# Altium PCB TLC5940ControlBoard.PcbDoc
Units mil, origin at the board's own origin, x right, y up, seen from the top; angles counter-clockwise.
Board outline 4320 x 3750 mil, 2 copper layers (Top Layer, Bottom Layer); 56 components, 103 nets, 256 pads, 18 vias.
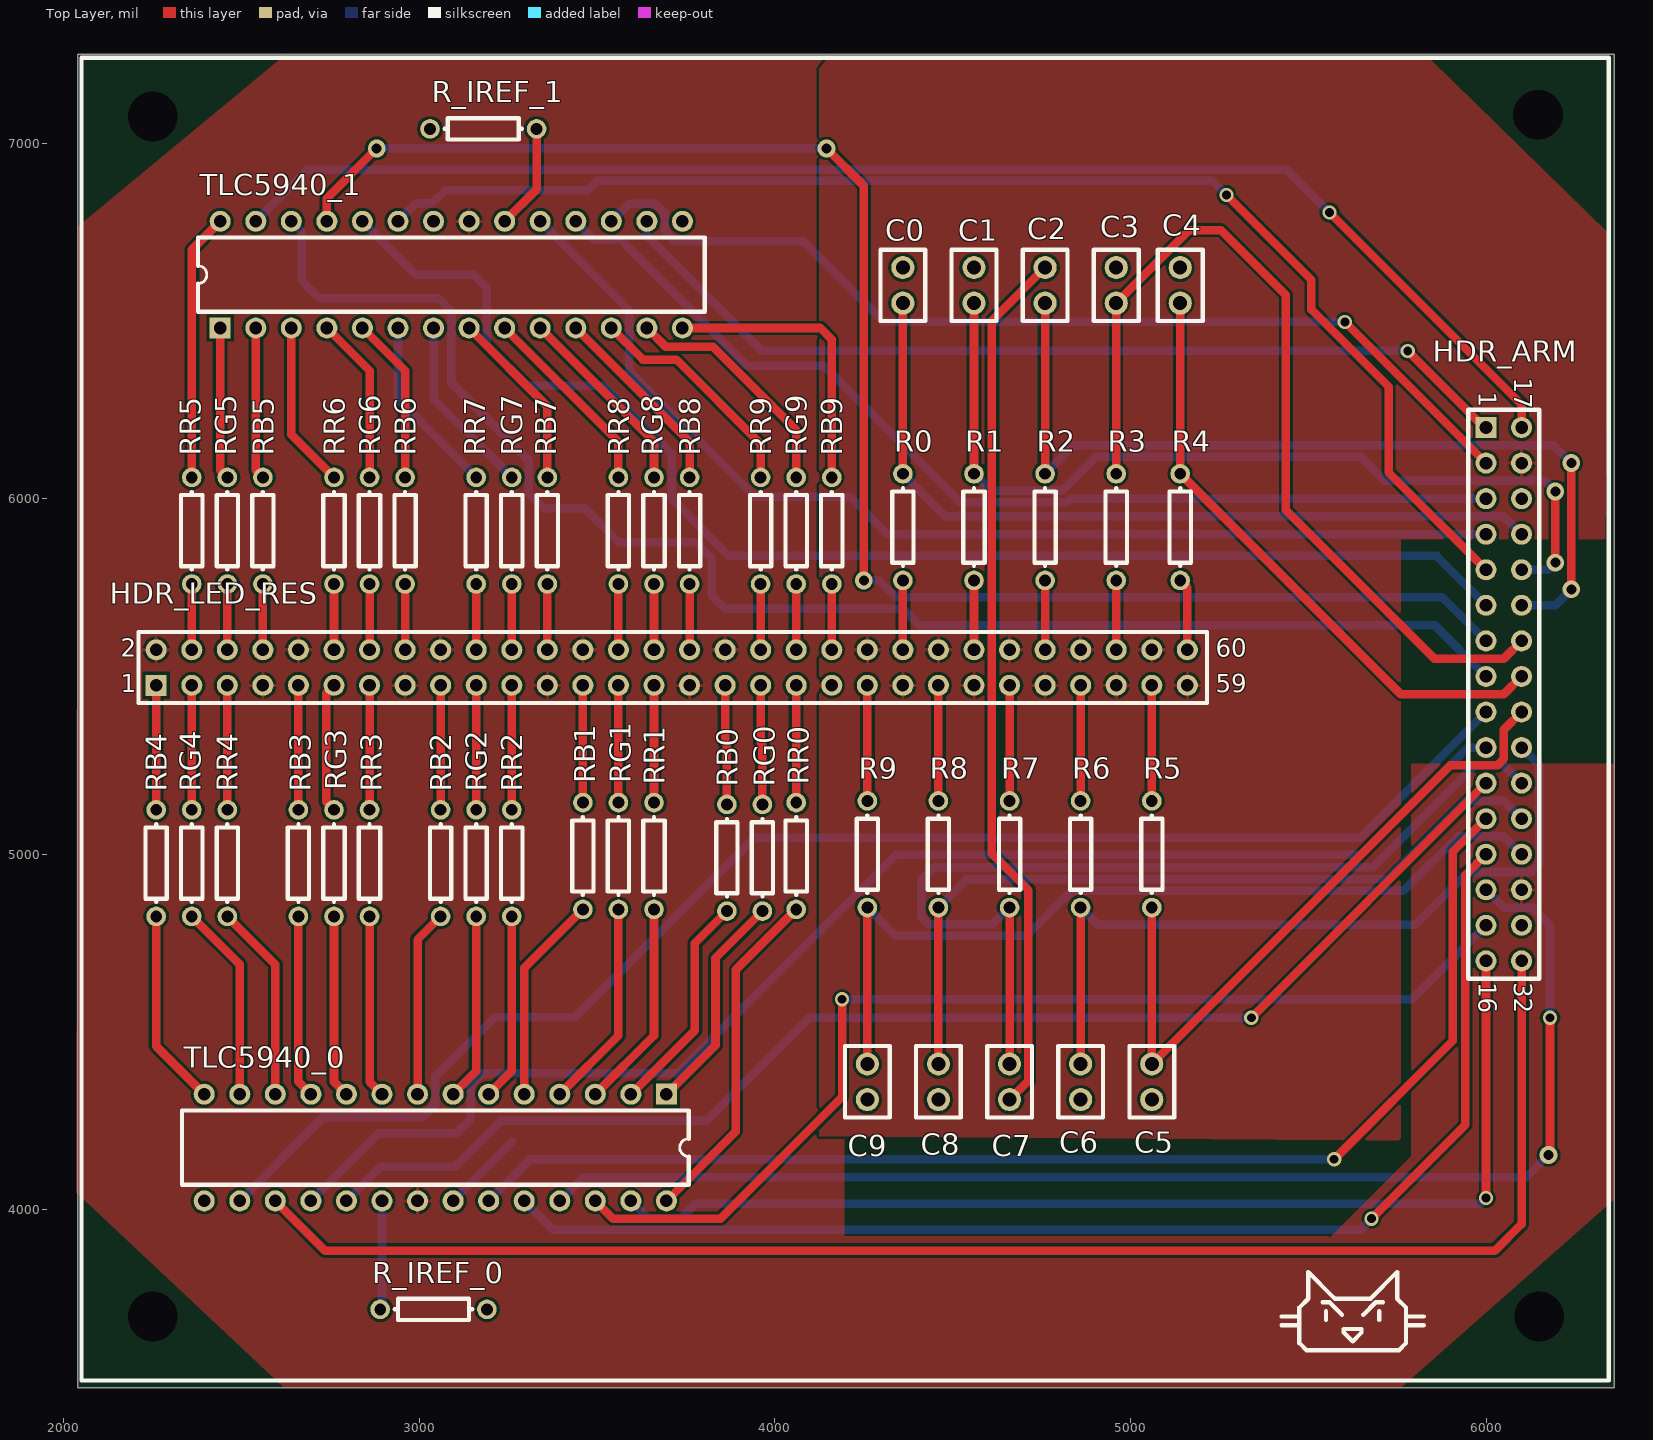
[diagram p0: Top Layer view]
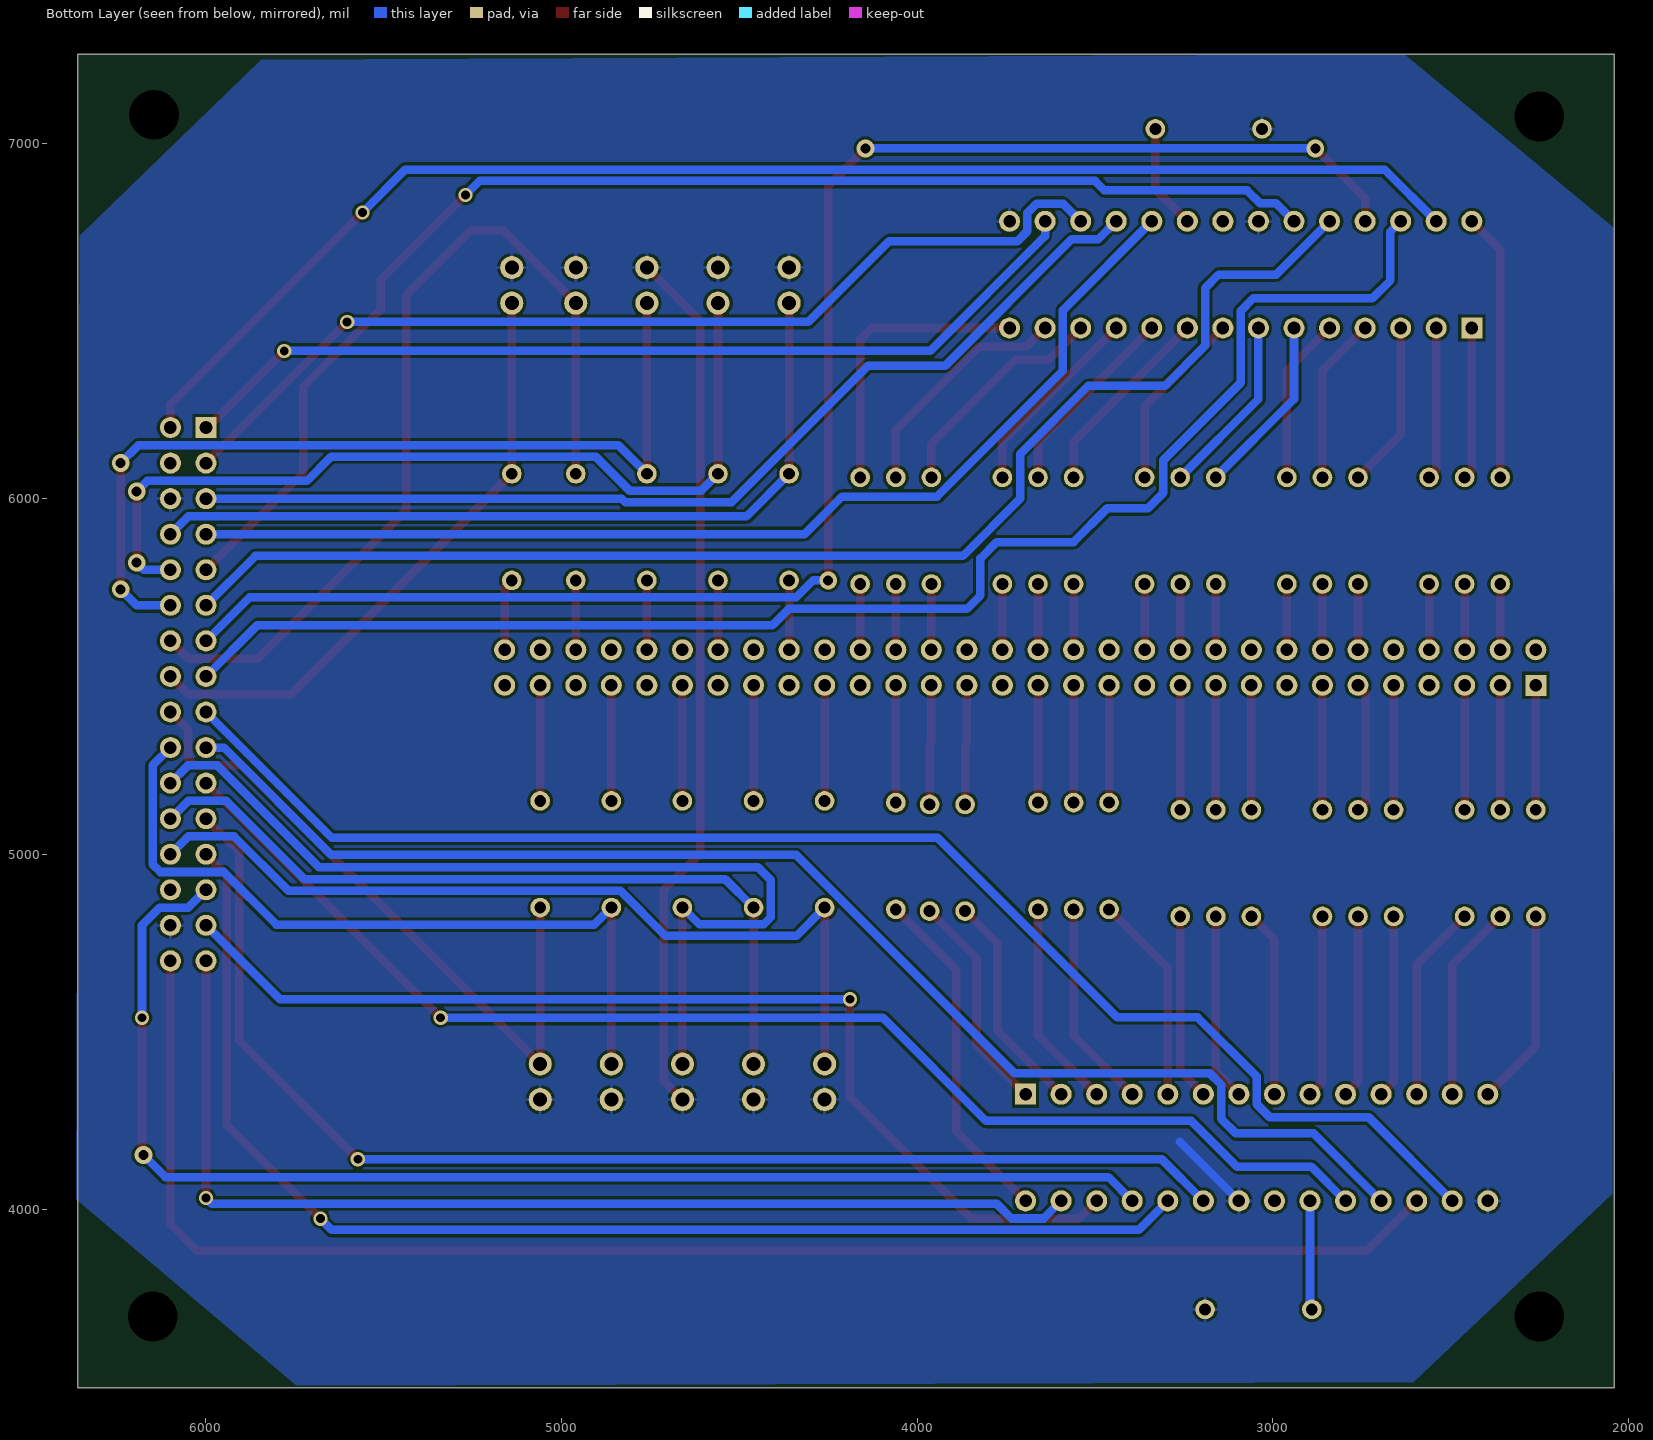
[diagram p1: Bottom Layer view, seen from below]

## Layer stack, top to bottom
Top Layer: signal copper 1.4
Dielectric: dielectric 12.6, FR-4, Dk 4.8
Bottom Layer: signal copper 1.4

## Board outline
2040,7250 6360,7250 6360,3500 2040,3500 2040,7250

## Design rules (kind name [scope] priority, off if disabled: settings)
Clearance [All] p1: gap=8
PolygonConnect [All] p1: connectstyle=Relief reliefconductorwidth=10 reliefentries=4 polygonreliefangle="90 Angle"
RoutingVias [All] p1: holewidth=25 width=40 viastyle="Through Hole" minholewidth=28 minwidth=50 maxholewidth=28 maxwidth=50
SilkscreenOverComponentPads [All] p1: minsilkscreentomaskgap=10
SolderMaskExpansion [All] p1: expansion=4
Width [All] p1: maxlimit=30 minlimit=6 preferedwidth=24 impedancedriven=TRUE minimp=50.000000 maximp=50.000000 favimp=50.000000
27 further rules are at their usual default settings.

## Components (designator, comment, footprint, x,y, rotation, side; value= is the part's Value field where it differs from the comment)
C0 "Cap" CAPR2.54-5.1x3.2 4360,6600 r270 top
C1 "Cap" CAPR2.54-5.1x3.2 4560,6600 r270 top
C2 "Cap" CAPR2.54-5.1x3.2 4760,6600 r270 top
C3 "Cap" CAPR2.54-5.1x3.2 4960,6600 r270 top
C4 "Cap" CAPR2.54-5.1x3.2 5140,6600 r270 top
C5 "Cap" CAPR2.54-5.1x3.2 5060,4360 r90 top
C6 "Cap" CAPR2.54-5.1x3.2 4860,4360 r90 top
C7 "Cap" CAPR2.54-5.1x3.2 4660,4360 r90 top
C8 "Cap" CAPR2.54-5.1x3.2 4460,4360 r90 top
C9 "Cap" CAPR2.54-5.1x3.2 4260,4360 r90 top
HDR_ARM "Header 16X2A" HDR2X16_CEN 6000,6200 r270 top
HDR_LED_RES "Header 30X2" HDR2X30 2260,5475 r0 top
R0 "Comment" AXIAL-0.3 4360,5920 r270 top
R1 "Comment" AXIAL-0.3 4560,5920 r270 top
R2 "Comment" AXIAL-0.3 4760,5920 r270 top
R3 "Comment" AXIAL-0.3 4960,5920 r270 top
R4 "Comment" AXIAL-0.3 5140,5920 r270 top
R5 "Comment" AXIAL-0.3 5060,5000 r90 top
R6 "Comment" AXIAL-0.3 4860,5000 r90 top
R7 "Comment" AXIAL-0.3 4660,5000 r90 top
R8 "Comment" AXIAL-0.3 4460,5000 r90 top
R9 "Comment" AXIAL-0.3 4260,5000 r90 top
R_IREF_0 "Res1" AXIAL-0.3 3040,3720 r180 top
R_IREF_1 "Res1" AXIAL-0.3 3180,7040 r0 top
RB0 "Res1" AXIAL-0.3 3865,4990 r90 top
RB1 "Res1" AXIAL-0.3 3460,4995 r90 top
RB2 "Res1" AXIAL-0.3 3060,4975 r90 top
RB3 "Res1" AXIAL-0.3 2660,4975 r90 top
RB4 "Res1" AXIAL-0.3 2260,4975 r90 top
RB5 "Res1" AXIAL-0.3 2560,5910 r270 top
RB6 "Res1" AXIAL-0.3 2960,5910 r270 top
RB7 "Res1" AXIAL-0.3 3360,5910 r270 top
RB8 "Res1" AXIAL-0.3 3760,5910 r270 top
RB9 "Res1" AXIAL-0.3 4160,5910 r270 top
RG0 "Res1" AXIAL-0.3 3965,4990 r90 top
RG1 "Res1" AXIAL-0.3 3560,4995 r90 top
RG2 "Res1" AXIAL-0.3 3160,4975 r90 top
RG3 "Res1" AXIAL-0.3 2760,4975 r90 top
RG4 "Res1" AXIAL-0.3 2360,4975 r90 top
RG5 "Res1" AXIAL-0.3 2460,5910 r270 top
RG6 "Res1" AXIAL-0.3 2860,5910 r270 top
RG7 "Res1" AXIAL-0.3 3260,5910 r270 top
RG8 "Res1" AXIAL-0.3 3660,5910 r270 top
RG9 "Res1" AXIAL-0.3 4060,5910 r270 top
RR0 "Res1" AXIAL-0.3 4060,4995 r90 top
RR1 "Res1" AXIAL-0.3 3660,4995 r90 top
RR2 "Res1" AXIAL-0.3 3260,4975 r90 top
RR3 "Res1" AXIAL-0.3 2860,4975 r90 top
RR4 "Res1" AXIAL-0.3 2460,4975 r90 top
RR5 "Res1" AXIAL-0.3 2360,5910 r270 top
RR6 "Res1" AXIAL-0.3 2760,5910 r270 top
RR7 "Res1" AXIAL-0.3 3160,5910 r270 top
RR8 "Res1" AXIAL-0.3 3560,5910 r270 top
RR9 "Res1" AXIAL-0.3 3960,5910 r270 top
TLC5940_0 "SLVS515_NT_28" NT028 3045,4175 r180 top
TLC5940_1 "SLVS515_NT_28" NT028 3090,6630 r0 top

## Footprints (in the part's own frame and the unit in brackets; to place one, negate y for a bottom-side part, rotate by r counter-clockwise, add the part's x,y. Pads: shape width x height; smd on the part's side, far side on the other; paste and mask are expansions set on the pad)
AXIAL-0.3 [mm] "Axial Device, Thru-Hole; 2 Leads; 0.3 in Pin Spacing"
  round 1.4 hole 0.85: 1(-3.81,0) 2(3.81,0)
  silkscreen extent -2.77,-0.76 2.77,0.76
CAPR2.54-5.1x3.2 [mm] "Capacitor, Ceramic, Thru-Hole, Dipped Radial; Body 5.1 x 3.2 mm (WxT) Pin Spacing 2.54 mm (typ)"
  round 1.65 hole 1: 1(-1.27,0) 2(1.27,0)
  silkscreen extent -2.55,-1.6 2.55,1.6
HDR2X16_CEN [mm] "Connector; Header; 16x2 Position"
  rect 1.5x1.5 hole 0.9: 1(0,0)
  round 1.5 hole 0.9: 2(2.54,0) 3(5.08,0) 4(7.62,0) 5(10.16,0) 6(12.7,0) 7(15.24,0) 8(17.78,0) 9(20.32,0) 10(22.86,0) 11(25.4,0) 12(27.94,0) 13(30.48,0) 14(33.02,0) 15(35.56,0) 16(38.1,0) 17(0,2.54) 18(2.54,2.54) 19(5.08,2.54) 20(7.62,2.54) 21(10.16,2.54) 22(12.7,2.54) 23(15.24,2.54) 24(17.78,2.54) 25(20.32,2.54) 26(22.86,2.54) 27(25.4,2.54) 28(27.94,2.54) 29(30.48,2.54) 30(33.02,2.54) 31(35.56,2.54) 32(38.1,2.54)
  silkscreen extent -1.27,-1.27 39.37,3.81
HDR2X30 [mm] "Connector; Header; 30x2 Position"
  rect 1.5x1.5 hole 0.9: 1(0,0)
  round 1.5 hole 0.9: 2(0,2.54) 3(2.54,0) 4(2.54,2.54) 5(5.08,0) 6(5.08,2.54) 7(7.62,0) 8(7.62,2.54) 9(10.16,0) 10(10.16,2.54) 11(12.7,0) 12(12.7,2.54) 13(15.24,0) 14(15.24,2.54) 15(17.78,0) 16(17.78,2.54) 17(20.32,0) 18(20.32,2.54) 19(22.86,0) 20(22.86,2.54) 21(25.4,0) 22(25.4,2.54) 23(27.94,0) 24(27.94,2.54) 25(30.48,0) 26(30.48,2.54) 27(33.02,0) 28(33.02,2.54) 29(35.56,0) 30(35.56,2.54) 31(38.1,0) 32(38.1,2.54) 33(40.64,0) 34(40.64,2.54) 35(43.18,0) 36(43.18,2.54) 37(45.72,0) 38(45.72,2.54) 39(48.26,0) 40(48.26,2.54) 41(50.8,0) 42(50.8,2.54) 43(53.34,0) 44(53.34,2.54) 45(55.88,0) 46(55.88,2.54) 47(58.42,0) 48(58.42,2.54) 49(60.96,0) 50(60.96,2.54) 51(63.5,0) 52(63.5,2.54) 53(66.04,0) 54(66.04,2.54) 55(68.58,0) 56(68.58,2.54) 57(71.12,0) 58(71.12,2.54) 59(73.66,0) 60(73.66,2.54)
  silkscreen extent -1.27,-1.27 75.06,3.81
NT028 [mm] "DIP; 28 Leads; Row Spacing 7.62 mm; Pitch 2.54 mm"
  rect 1.5x1.5 hole 0.9: 1(-16.51,-3.81)
  round 1.5 hole 0.9: 2(-13.97,-3.81) 3(-11.43,-3.81) 4(-8.89,-3.81) 5(-6.35,-3.81) 6(-3.81,-3.81) 7(-1.27,-3.81) 8(1.27,-3.81) 9(3.81,-3.81) 10(6.35,-3.81) 11(8.89,-3.81) 12(11.43,-3.81) 13(13.97,-3.81) 14(16.51,-3.81) 15(16.51,3.81) 16(13.97,3.81) 17(11.43,3.81) 18(8.89,3.81) 19(6.35,3.81) 20(3.81,3.81) 21(1.27,3.81) 22(-1.27,3.81) 23(-3.81,3.81) 24(-6.35,3.81) 25(-8.89,3.81) 26(-11.43,3.81) 27(-13.97,3.81) 28(-16.51,3.81)
  silkscreen extent -18.1,-2.65 18.1,2.65

## Part data
C0 C1 C2 C3 C4 C5 C6 C7 C8 C9: "Capacitor"
HDR_ARM: "Header, 16-Pin, Dual row"
HDR_LED_RES: "Header, 30-Pin, Dual row"
R0 R1 R2 R3 R4 R5 R6 R7 R8 R9: library part Res1, "Resistor"
R_IREF_0 R_IREF_1 RB0 RB1 RB2 RB3 RB4 RB5 RB6 RB7 RB8 RB9 RG0 RG1 RG2 RG3 RG4 RG5 RG6 RG7 RG8 RG9 RR0 RR1 RR2 RR3 RR4 RR5 RR6 RR7 RR8 RR9: "Resistor"

## Free pads (board coordinates)
  round 60 hole 140: 2(2250,7075) 3(2250,3700) 4(6150,3700) 5(6145.91,7079.98)

## Via types
v1: diameter 40, hole 25, Top Layer to Bottom Layer, 10 vias
v2: diameter 50, hole 28, Top Layer to Bottom Layer, 8 vias

## Nets (pads, with @x,y where several pads share a name; then routed paths per layer and width w, separated by ;. In a path a pad name is that pad's centre, name@x,y a point inside that pad or via, vN(x,y) a via of type N, cw(c..) or ccw(c..) an arc to the next point about the centre after c; other vN are vias at no path point)
BLANK_0: HDR_ARM.12 TLC5940_0.23 | length 3561.3
  Top Layer w24: v1(5573,4142) 5906,4475 5906,5006 HDR_ARM.12
  Bottom Layer w24: TLC5940_0.23 3312,4142 v1(5573,4142)
BLANK_1: HDR_ARM.5 TLC5940_1.23 | length 3749.8
  Top Layer w24: v1(5270,6854) 5509,6615 5509,6532 5726,6315 5726,6074 HDR_ARM.5
  Bottom Layer w24: TLC5940_1.23 2991,6831 3036,6831 3072,6867 3473,6867 3499.53,6893.53 5230.47,6893.53 v1(5270,6854)
CAPREADING0: C0.2 HDR_ARM.20 R0.1 | length 2290.4
  Top Layer w24: R0.1 C0.2
  Bottom Layer w24: R0.1 4480,5950 6050,5950 HDR_ARM.20
CAPREADING1: C1.2 HDR_ARM.21 R1.1 | length 2518.2
  Top Layer w24: R1.1 C1.2 ; v2(6195,5820) v2(6195,6020)
  Bottom Layer w24: R1.1 4607.56,6022.44 4808,6022.44 4903.56,6118 5648,6118 5716,6050 6165,6050 v2(6195,6020) ; HDR_ARM.21 6175,5800 v2(6195,5820)
CAPREADING2: C2.2 HDR_ARM.22 R2.1 | length 2527.5
  Top Layer w24: R2.1 C2.2 ; v2(6240,5745) v2(6240,6100)
  Bottom Layer w24: R2.1 4840,6150 6190,6150 v2(6240,6100) ; HDR_ARM.22 6195,5700 v2(6240,5745)
CAPREADING3: C3.2 HDR_ARM.23 R3.1 | length 2579.2
  Top Layer w24: R3.1 C3.2 5165,6755 5255,6755 5437,6573 5437,5968 5855,5550 6050,5550 HDR_ARM.23
CAPREADING4: C4.2 HDR_ARM.24 R4.1 | length 1717.5
  Top Layer w24: C4.2 R4.1 5760,5450 6050,5450 HDR_ARM.24
CAPREADING5: C5.2 HDR_ARM.25 R5.1 | length 1938.1
  Top Layer w24: R5.1 C5.2 5900,5250 6032,5250 6050,5268 6050,5350 HDR_ARM.25
CAPREADING6: C6.2 HDR_ARM.26 R6.1 | length 2169
  Top Layer w24: C6.2 R6.1
  Bottom Layer w24: R6.1 4908,4802 5802,4802 5950,4950 6128,4950 6150,4972 6150,5250 HDR_ARM.26
CAPREADING7: C7.2 HDR_ARM.27 R7.1 | length 2663.6
  Top Layer w24: C7.2 R7.1
  Bottom Layer w24: R7.1 4612.44,4802.44 4432,4802.44 4412,4822.44 4412,4928 4448,4964 5682.89,4964 5968.89,5250 6050,5250 HDR_ARM.27
CAPREADING8: C8.2 HDR_ARM.28 R8.1 | length 2225
  Top Layer w24: C8.2 R8.1
  Bottom Layer w24: R8.1 4539.56,4929.56 5722.82,4929.56 5943.26,5150 6050,5150 HDR_ARM.28
CAPREADING9: C9.2 HDR_ARM.29 R9.1 | length 2449.5
  Top Layer w24: C9.2 R9.1
  Bottom Layer w24: R9.1 4339.56,4770.44 4708,4770.44 4835.12,4897.56 5768.56,4897.56 5921,5050 6050,5050 HDR_ARM.29
DCPRG_0: HDR_ARM.11 TLC5940_0.19 | length 3691.7
  Top Layer w24: v1(5340,4540) HDR_ARM.11
  Bottom Layer w24: TLC5940_0.19 2891,4121 3100,4121 3229,4250 3806,4250 4096,4540 v1(5340,4540)
DCPRG_1: HDR_ARM.4 TLC5940_1.19 | length 3124.1
  Bottom Layer w24: TLC5940_1.19 3590,6530 3590,6360 3944,6006 4211,6006 4317,5900 HDR_ARM.4
GND: C0.1 C1.1 C2.1 C3.1 C4.1 C5.1 C6.1 C7.1 C8.1 C9.1 HDR_ARM.19 HDR_ARM.31 R_IREF_0.1 R_IREF_1.1 TLC5940_0.15 TLC5940_0.22 TLC5940_1.15 TLC5940_1.22 | length 2701.5
  Top Layer w24: C7.1 4713,4363 4713,4899 4610,5002 4610,6500 C2.1
  Bottom Layer w24: TLC5940_0.22 3261,4191
GSCLK_0: HDR_ARM.10 TLC5940_0.18 | length 3889.4
  Bottom Layer w24: TLC5940_0.18 2885,4215 3104,4215 3145,4256 3145,4352 3177,4384 3726,4384 4340,4998 5647.72,4998 5949.72,5300 HDR_ARM.10
GSCLK_1: HDR_ARM.3 TLC5940_1.18 | length 2891
  Bottom Layer w24: TLC5940_1.18 3490,6730 3565,6730 3921,6374 4138,6374 4521.56,5990.44 4821.44,5990.44 4831,6000 HDR_ARM.3
LED0_BLUE: HDR_LED_RES.33 RB0.2 | length 337.1
  Top Layer w24: HDR_LED_RES.33 3860,5313 3865,5308 RB0.2
LED0_GREEN: HDR_LED_RES.35 RG0.2 | length 337.1
  Top Layer w24: HDR_LED_RES.35 3960,5313 3965,5308 RG0.2
LED0_RED: HDR_LED_RES.37 RR0.2 | length 330
  Top Layer w24: RR0.2 HDR_LED_RES.37
LED1_BLUE: HDR_LED_RES.25 RB1.2 | length 330
  Top Layer w24: RB1.2 HDR_LED_RES.25
LED1_GREEN: HDR_LED_RES.27 RG1.2 | length 330
  Top Layer w24: RG1.2 HDR_LED_RES.27
LED1_RED: HDR_LED_RES.29 RR1.2 | length 330
  Top Layer w24: RR1.2 HDR_LED_RES.29
LED2_BLUE: HDR_LED_RES.17 RB2.2 | length 350
  Top Layer w24: RB2.2 HDR_LED_RES.17
LED2_GREEN: HDR_LED_RES.19 RG2.2 | length 350
  Top Layer w24: RG2.2 HDR_LED_RES.19
LED2_RED: HDR_LED_RES.21 RR2.2 | length 350
  Top Layer w24: RR2.2 HDR_LED_RES.21
LED3_BLUE: HDR_LED_RES.9 RB3.2 | length 350
  Top Layer w24: RB3.2 HDR_LED_RES.9
LED3_GREEN: HDR_LED_RES.11 RG3.2 | length 368.2
  Top Layer w24: RG3.2 2738,5147 2738,5453 HDR_LED_RES.11
LED3_RED: HDR_LED_RES.13 RR3.2 | length 350
  Top Layer w24: RR3.2 HDR_LED_RES.13
LED4_BLUE: HDR_LED_RES.1 RB4.2 | length 350
  Top Layer w24: RB4.2 HDR_LED_RES.1
LED4_GREEN: HDR_LED_RES.3 RG4.2 | length 350
  Top Layer w24: RG4.2 HDR_LED_RES.3
LED4_RED: HDR_LED_RES.5 RR4.2 | length 350
  Top Layer w24: RR4.2 HDR_LED_RES.5
LED5_BLUE: HDR_LED_RES.8 RB5.2 | length 185
  Top Layer w24: HDR_LED_RES.8 RB5.2
LED5_GREEN: HDR_LED_RES.6 RG5.2 | length 185
  Top Layer w24: HDR_LED_RES.6 RG5.2
LED5_RED: HDR_LED_RES.4 RR5.2 | length 185
  Top Layer w24: HDR_LED_RES.4 RR5.2
LED6_BLUE: HDR_LED_RES.16 RB6.2 | length 185
  Top Layer w24: HDR_LED_RES.16 RB6.2
LED6_GREEN: HDR_LED_RES.14 RG6.2 | length 185
  Top Layer w24: HDR_LED_RES.14 RG6.2
LED6_RED: HDR_LED_RES.12 RR6.2 | length 185
  Top Layer w24: HDR_LED_RES.12 RR6.2
LED7_BLUE: HDR_LED_RES.24 RB7.2 | length 185
  Top Layer w24: HDR_LED_RES.24 RB7.2
LED7_GREEN: HDR_LED_RES.22 RG7.2 | length 185
  Top Layer w24: HDR_LED_RES.22 RG7.2
LED7_RED: HDR_LED_RES.20 RR7.2 | length 185
  Top Layer w24: HDR_LED_RES.20 RR7.2
LED8_BLUE: HDR_LED_RES.32 RB8.2 | length 185
  Top Layer w24: HDR_LED_RES.32 RB8.2
LED8_GREEN: HDR_LED_RES.30 RG8.2 | length 185
  Top Layer w24: HDR_LED_RES.30 RG8.2
LED8_RED: HDR_LED_RES.28 RR8.2 | length 185
  Top Layer w24: HDR_LED_RES.28 RR8.2
LED9_BLUE: HDR_LED_RES.40 RB9.2 | length 185
  Top Layer w24: HDR_LED_RES.40 RB9.2
LED9_GREEN: HDR_LED_RES.38 RG9.2 | length 185
  Top Layer w24: HDR_LED_RES.38 RG9.2
LED9_RED: HDR_LED_RES.36 RR9.2 | length 185
  Top Layer w24: HDR_LED_RES.36 RR9.2
NetR_IREF_0_2: R_IREF_0.2 TLC5940_0.20 | length 300
  Bottom Layer w24: R_IREF_0.2@2895,3725 TLC5940_0.20
NetR_IREF_1_2: R_IREF_1.2 TLC5940_1.20 | length 297.3
  Top Layer w24: TLC5940_1.20 3330,6870 R_IREF_1.2
NetRB0_1: RB0.1 TLC5940_0.2 | length 626.8
  Top Layer w24: TLC5940_0.2 3775,4505 3775,4750 RB0.1
NetRB1_1: RB1.1 TLC5940_0.5 | length 588.3
  Top Layer w24: TLC5940_0.5 3295,4680 RB1.1
NetRB2_1: RB2.1 TLC5940_0.8 | length 526.9
  Top Layer w24: TLC5940_0.8 2995,4760 RB2.1
NetRB3_1: RB3.1 TLC5940_0.11 | length 514.5
  Top Layer w24: RB3.1 2660,4360 TLC5940_0.11
NetRB4_1: RB4.1 TLC5940_0.14 | length 555.9
  Top Layer w24: RB4.1 2260,4460 TLC5940_0.14
NetRB5_1: RB5.1 TLC5940_1.2 | length 428.3
  Top Layer w24: TLC5940_1.2 2540,6080 RB5.1
NetRB6_1: RB6.1 TLC5940_1.5 | length 469.7
  Top Layer w24: TLC5940_1.5 2960,6360 RB6.1
NetRB7_1: RB7.1 TLC5940_1.8 | length 511.1
  Top Layer w24: TLC5940_1.8 3360,6260 RB7.1
NetRB8_1: RB8.1 TLC5940_1.11 | length 552.5
  Top Layer w24: TLC5940_1.11 3760,6160 RB8.1
NetRB9_1: RB9.1 TLC5940_1.14 | length 821.3
  Top Layer w24: TLC5940_1.14 4128,6480 4160,6448 RB9.1
NetRG0_1: RG0.1 TLC5940_0.1 | length 626.8
  Top Layer w24: TLC5940_0.1 3833,4463 3833,4708 RG0.1
NetRG1_1: RG1.1 TLC5940_0.4 | length 588.3
  Top Layer w24: TLC5940_0.4 3560,4490 RG1.1
NetRG2_1: RG2.1 TLC5940_0.7 | length 526.9
  Top Layer w24: TLC5940_0.7 3160,4390 RG2.1
NetRG3_1: RG3.1 TLC5940_0.10 | length 514.5
  Top Layer w24: RG3.1 2760,4360 TLC5940_0.10
NetRG4_1: RG4.1 TLC5940_0.13 | length 555.9
  Top Layer w24: RG4.1 2495,4690 TLC5940_0.13
NetRG5_1: RG5.1 TLC5940_1.1 | length 428.3
  Top Layer w24: TLC5940_1.1 2440,6080 RG5.1
NetRG6_1: RG6.1 TLC5940_1.4 | length 469.7
  Top Layer w24: TLC5940_1.4 2860,6360 RG6.1
NetRG7_1: RG7.1 TLC5940_1.7 | length 511.1
  Bottom Layer w24: TLC5940_1.7 3040,6280 RG7.1
NetRG8_1: RG8.1 TLC5940_1.10 | length 552.5
  Top Layer w24: TLC5940_1.10 3660,6160 RG8.1
NetRG9_1: RG9.1 TLC5940_1.13 | length 671.9
  Top Layer w24: TLC5940_1.13 3693,6427 3826,6427 4060,6193 RG9.1
NetRR0_1: RR0.1 TLC5940_0.28 | length 971.2
  Top Layer w24: TLC5940_0.28 3890,4220 3890,4675 RR0.1
NetRR1_1: RR1.1 TLC5940_0.3 | length 588.3
  Top Layer w24: TLC5940_0.3 3660,4490 RR1.1
NetRR2_1: RR2.1 TLC5940_0.6 | length 526.9
  Top Layer w24: TLC5940_0.6 3260,4390 RR2.1
NetRR3_1: RR3.1 TLC5940_0.9 | length 514.5
  Top Layer w24: RR3.1 2860,4360 TLC5940_0.9
NetRR4_1: RR4.1 TLC5940_0.12 | length 555.9
  Top Layer w24: RR4.1 2595,4690 TLC5940_0.12
NetRR5_1: RR5.1 TLC5940_1.28 | length 753.1
  Top Layer w24: RR5.1 2360,6700 TLC5940_1.28
NetRR6_1: RR6.1 TLC5940_1.3 | length 469.7
  Top Layer w24: TLC5940_1.3 2640,6180 RR6.1
NetRR7_1: RR7.1 TLC5940_1.6 | length 511.1
  Bottom Layer w24: TLC5940_1.6 2940,6280 RR7.1
NetRR8_1: RR8.1 TLC5940_1.9 | length 552.5
  Top Layer w24: TLC5940_1.9 3560,6160 RR8.1
NetRR9_1: RR9.1 TLC5940_1.12 | length 649
  Top Layer w24: TLC5940_1.12 3629,6391 3723,6391 3960,6154 RR9.1
PR0_OUT: HDR_LED_RES.44 R0.2 | length 195
  Top Layer w24: HDR_LED_RES.44 R0.2
PR1_OUT: HDR_LED_RES.48 R1.2 | length 195
  Top Layer w24: HDR_LED_RES.48 R1.2
PR2_OUT: HDR_LED_RES.52 R2.2 | length 195
  Top Layer w24: HDR_LED_RES.52 R2.2
PR3_OUT: HDR_LED_RES.56 R3.2 | length 195
  Top Layer w24: HDR_LED_RES.56 R3.2
PR4_OUT: HDR_LED_RES.60 R4.2 | length 203.3
  Top Layer w24: R4.2 5160,5750 HDR_LED_RES.60
PR5_OUT: HDR_LED_RES.57 R5.2 | length 325
  Top Layer w24: R5.2 HDR_LED_RES.57
PR6_OUT: HDR_LED_RES.53 R6.2 | length 325
  Top Layer w24: R6.2 HDR_LED_RES.53
PR7_OUT: HDR_LED_RES.49 R7.2 | length 325
  Top Layer w24: R7.2 HDR_LED_RES.49
PR8_OUT: HDR_LED_RES.45 R8.2 | length 325
  Top Layer w24: R8.2 HDR_LED_RES.45
PR9_OUT: HDR_LED_RES.41 R9.2 | length 325
  Top Layer w24: R9.2 HDR_LED_RES.41
SCLK_0: HDR_ARM.14 TLC5940_0.25 | length 3704.3
  Top Layer w24: v2(6176,4154) 6175,4155 6180,4160 v1(6180,4540)
  Bottom Layer w24: TLC5940_0.25 3462,4092 6114,4092 v2(6176,4154) ; HDR_ARM.14 6050,4850 6130,4850 6180,4800 v1(6180,4540)
SCLK_1: HDR_ARM.7 TLC5940_1.25 | length 4614
  Top Layer w24: TLC5940_1.25 2740,6845 v2(2880,6985) v2@2885,6980 ; v2(4145,6985) 4250,6880 v2(4250,5770)
  Bottom Layer w24: v2(2880,6985) v2(4145,6985) ; v2(4250,5770) 4292.74,5770 4340.3,5722.44 5877.56,5722.44 HDR_ARM.7
SIN_0: HDR_ARM.15 TLC5940_0.26 | length 3028.5
  Top Layer w24: TLC5940_0.26 3545,3975 3847,3975 4189,4317 v1(4189,4592)
  Bottom Layer w24: v1(4189,4592) 5792,4592 HDR_ARM.15
SIN_1: HDR_ARM.8 TLC5940_1.26 | length 4203.6
  Bottom Layer w24: TLC5940_1.26 2669,6751 2669,6614 2720,6563 3055,6563 3090,6528 3090,6326 3308,6108 3308,6016 3351,5973 3465,5973 3560,5878 3776,5878 3822,5832 3822,5728 3860,5690 4361,5690 4407,5644 5856,5644 HDR_ARM.8
SOUT_0: HDR_ARM.32 TLC5940_0.17 | length 4334.1
  Top Layer w24: TLC5940_0.17 2735,3885 6025,3885 6100,3960 HDR_ARM.32
SOUT_1: HDR_ARM.2 TLC5940_1.17 | length 2812.9
  Top Layer w24: v1(5603,6497) HDR_ARM.2
  Bottom Layer w24: TLC5940_1.17 3589.53,6829.53 3664,6829.53 3690,6803.53 3690,6752 3718,6724 4079,6724 4306,6497 v1(5603,6497)
VDD_LED: HDR_ARM.30 HDR_LED_RES.2 HDR_LED_RES.7 HDR_LED_RES.10 HDR_LED_RES.15 HDR_LED_RES.18 HDR_LED_RES.23 HDR_LED_RES.26 HDR_LED_RES.31 HDR_LED_RES.34 HDR_LED_RES.39 TLC5940_0.21 TLC5940_1.21
VDD_RESISTOR: HDR_ARM.18 HDR_LED_RES.42 HDR_LED_RES.43 HDR_LED_RES.46 HDR_LED_RES.47 HDR_LED_RES.50 HDR_LED_RES.51 HDR_LED_RES.54 HDR_LED_RES.55 HDR_LED_RES.58 HDR_LED_RES.59
VPRG_0: HDR_ARM.16 TLC5940_0.27 | length 3116.3
  Top Layer w24: v1(6000,4033) HDR_ARM.16
  Bottom Layer w24: TLC5940_0.27 3644.53,3975.47 3734.47,3975.47 3776,4017 5984,4017 v1(6000,4033)
VPRG_1: HDR_ARM.17 TLC5940_1.27 | length 3958.9
  Top Layer w24: v1(5560,6805) 6100,6265 HDR_ARM.17
  Bottom Layer w24: TLC5940_1.27 2685.53,6925.53 5439.47,6925.53 v1(5560,6805)
XERR_0: HDR_ARM.9 TLC5940_0.16 | length 4120.2
  Bottom Layer w24: TLC5940_0.16 2730,4260 3008,4260 3045,4297 3045,4375 3211,4541 3436.88,4541 3941.88,5046 5646,5046 HDR_ARM.9
XERR_1: HDR_ARM.1 TLC5940_1.16 | length 2625.2
  Top Layer w24: v1@5785,6415 v1(5780,6415) HDR_ARM.1@5995,6200
  Bottom Layer w24: TLC5940_1.16 3640,6738.47 3962.47,6416 5780,6416 v1(5780,6415)
XLAT_0: HDR_ARM.13 TLC5940_0.24 | length 3588.2
  Top Layer w24: v1(5678,3975) 5942,4239 5942,4942 HDR_ARM.13
  Bottom Layer w24: TLC5940_0.24 3376.53,3943.47 5646.47,3943.47 v1(5678,3975)
XLAT_1: HDR_ARM.6 TLC5940_1.24 | length 3776.1
  Bottom Layer w24: TLC5940_1.24 2990,6630 3152,6630 3190,6592 3190,6430 3303,6317 3519,6317 3710,6126 3710,6000 3871,5839 5861,5839 HDR_ARM.6

## Polygon pours and split planes (outlines as drawn)
VDD_RESISTOR on Top Layer "Top Layer-No Net" (solid, pour order 1000): 4125,4206.66 4125,7210.01 4130,7215.84 4155,7245 5845,7235 6345,6745 6335,5880.37 6330.83,5885.24 5759.83,5885.24 5759.83,4200.63 5755,4195
VDD_LED on Top Layer "Top Layer-No Net" (solid, pour order 1001): 6360,5255 6360,4030 5760,3500 2620,3500 2035,4050 2040,6765 2620,7245 4205,7240 4195,7230 4195,3925 5556,3925 5560,3921 5790,4151 5790,5255
GND on Bottom Layer "Top Layer-No Net" (solid, pour order 1000): 2040,6760 2630,7250 5845,7235 6355,6740 6365,4030 5745,3505 2605,3515 2045,4045

## Silkscreen, mask and mechanical layers (free items; w line width, h text height)
Top Overlay:
  lines w12: 5425,3675 5475,3675 ; 5425,3700 5475,3700 ; 5540,3740 5560,3740 5595,3705 ; 5550,3690 5550,3715 ; 5655,3705 5690,3740 5710,3740 ; 5700,3690 5700,3715 ; 5775,3675 5825,3675 ; 5775,3700 5825,3700 ; 2050,3520 2050,7240 6345,7240 6345,3520 2050,3520 ; 5475,3625 5495,3605 5500,3605 5525,3605 5755,3605 5775,3625 5775,3725 5750,3750 5750,3825 5675,3750 5575,3750 5570,3755 5500,3825 5500,3750 5475,3725 5475,3625 ; 5600,3655 5625,3630 5650,3655 5650,3665 5600,3665 5600,3655

## Text inside footprints (layer, text, board x,y; h text height)
HDR_ARM: Top Overlay "17" at 6080,6340 h50 r270; Top Overlay "1" at 5980,6300 h50 r270; Top Overlay "16" at 5980,4640 h50 r270; Top Overlay "32" at 6080,4640 h50 r270
HDR_LED_RES: Top Overlay "60" at 5240,5555 h50; Top Overlay "59" at 5240,5455 h50; Top Overlay "1" at 2160,5455 h50; Top Overlay "2" at 2160,5555 h50; Bottom Overlay "1" at 60,5455 h50